# EAGLE board QwiicHUD-Panel (EAGLE 9.1.3)
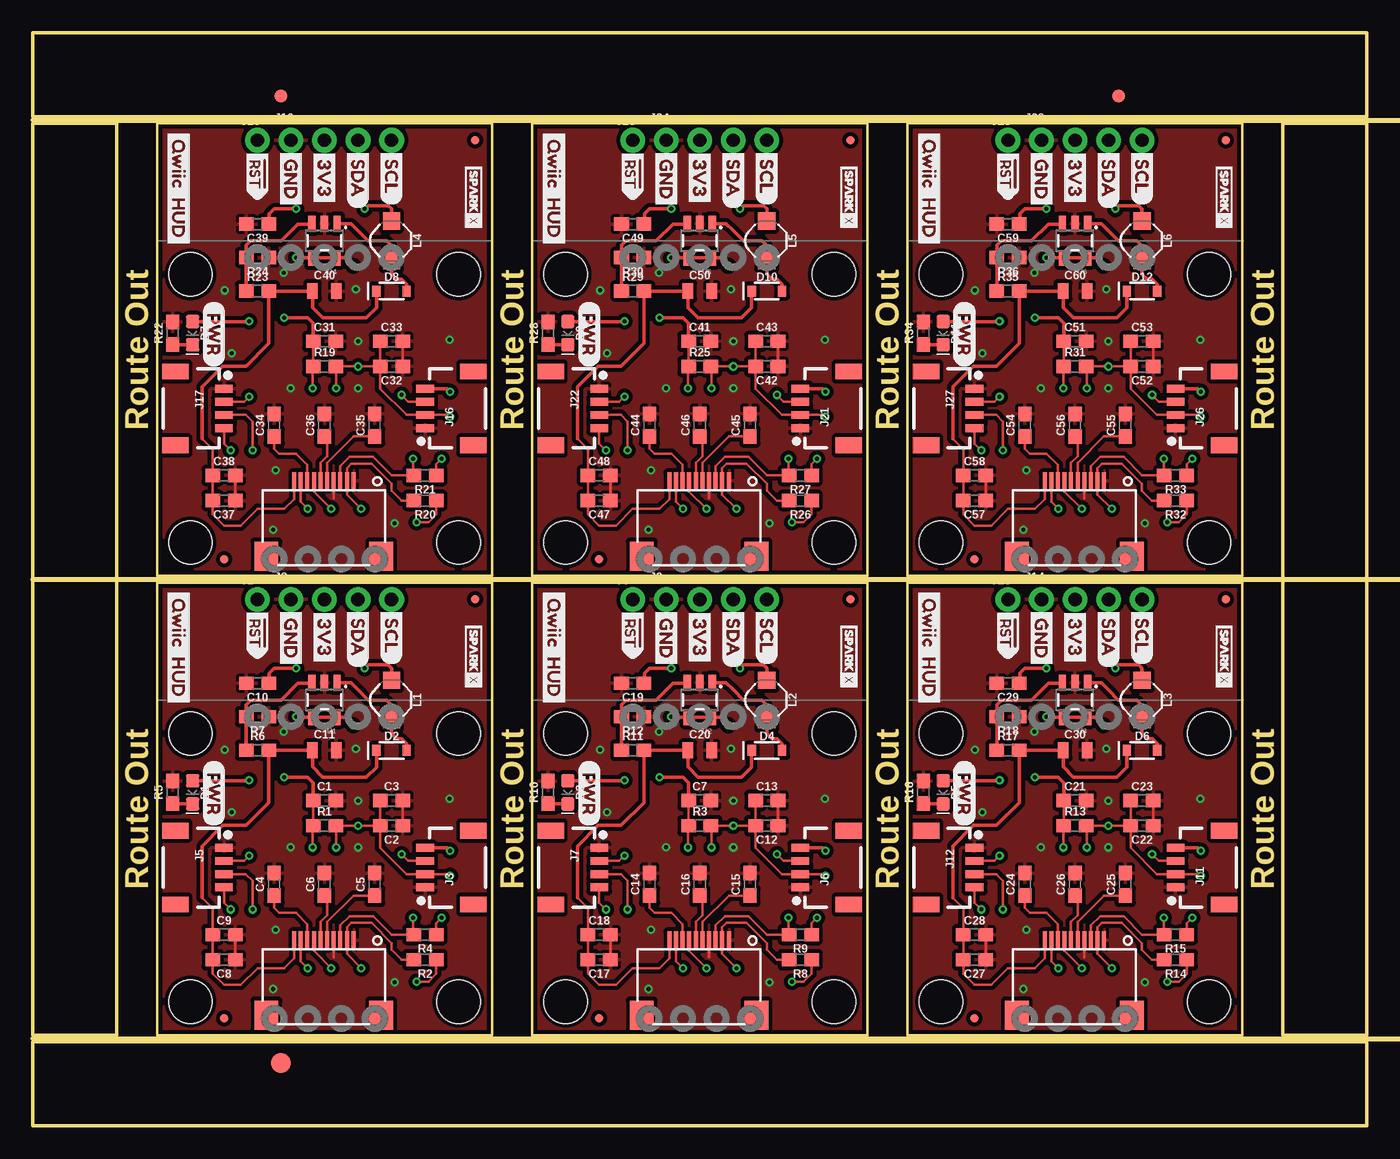
[diagram p0: board, top side]
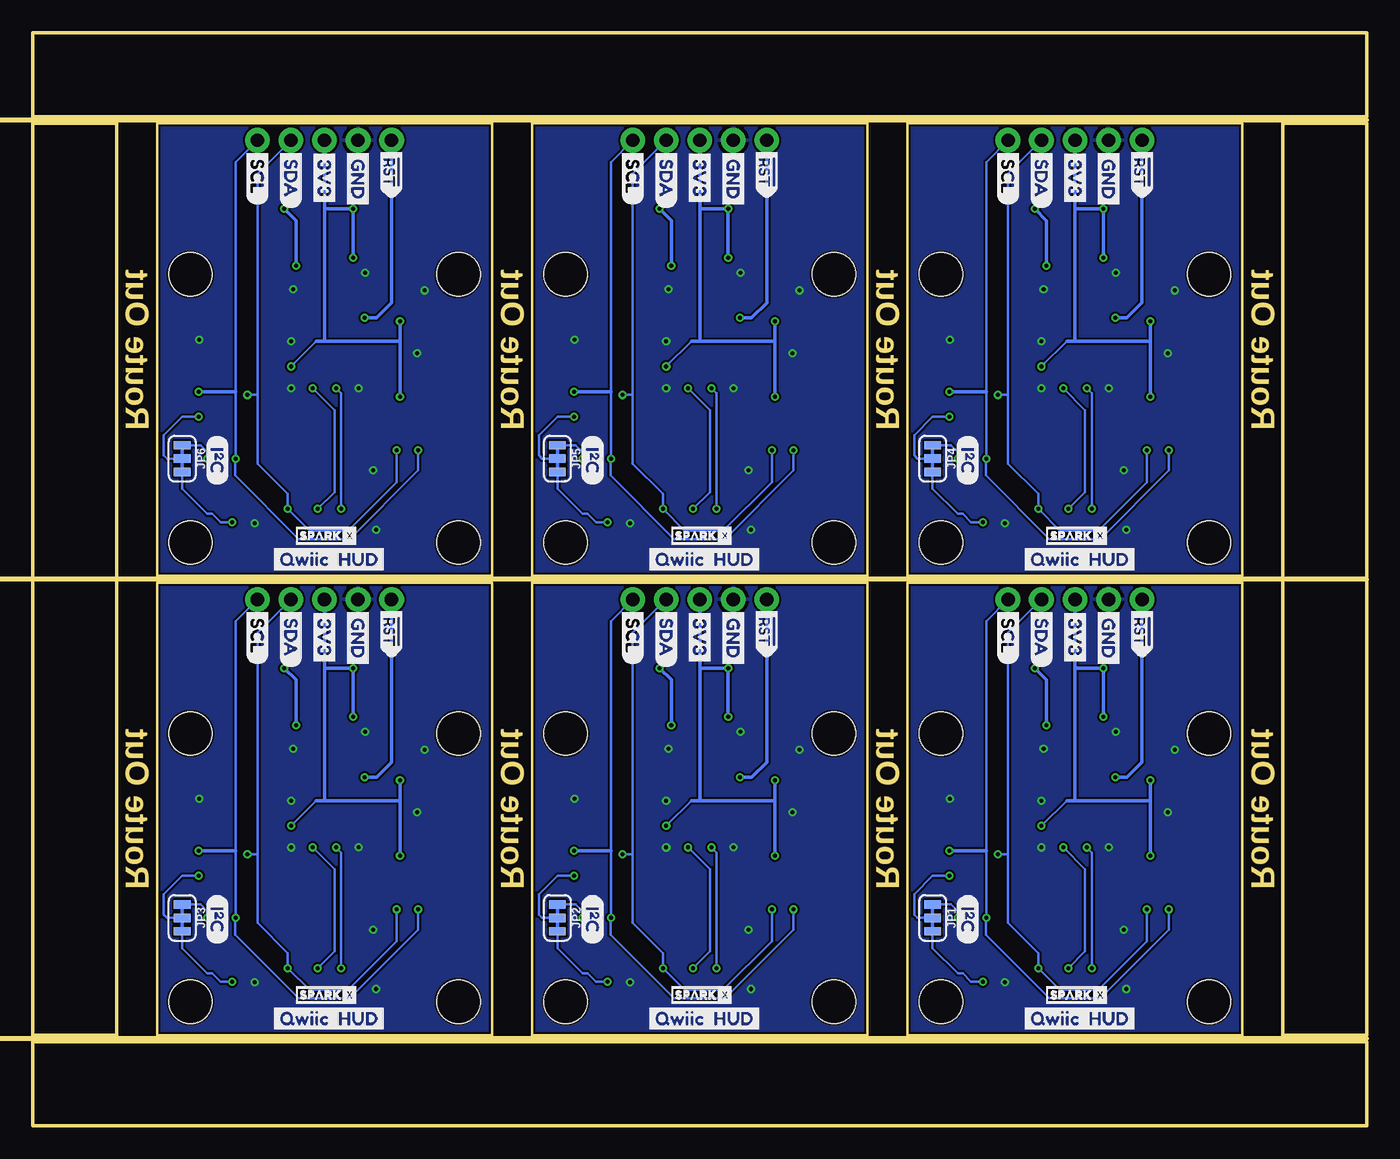
[diagram p1: board, bottom side, seen from below]

Size 101.09 x 82.8 mm. Coordinates in mm from the lower left corner, seen from the top.
Outline: 9.4,41.15 34.8,41.15 34.8,6.86 9.4,6.86 9.4,41.15
Outline: 37.85,41.15 63.25,41.15 63.25,6.86 37.85,6.86 37.85,41.15
Outline: 66.29,41.15 91.69,41.15 91.69,6.86 66.29,6.86 66.29,41.15
Outline: 9.4,75.95 34.8,75.95 34.8,41.66 9.4,41.66 9.4,75.95
Outline: 37.85,75.95 63.25,75.95 63.25,41.66 37.85,41.66 37.85,75.95
Outline: 66.29,75.95 91.69,75.95 91.69,41.66 66.29,41.66 66.29,75.95
Outline: 0,6.35 101.09,6.35 101.09,0 0,0 0,6.35
Outline: 94.74,75.95 101.09,75.95 101.09,6.86 94.74,6.86 94.74,75.95
Outline: 0,82.8 101.09,82.8 101.09,76.45 0,76.45 0,82.8
Outline: 0,75.95 6.35,75.95 6.35,6.86 0,6.86 0,75.95
Copper layers (1*16): Top 0.035mm / dielectric 1.5mm / Bottom 0.035mm
Design rules "SparkFun-2-layer-PCBWay-LIMIT": minimum track width 6mil, minimum drill 0.3mm, track to track 6mil, track to pad 6mil, pad to pad 6mil, via to via 6mil, smd to smd 6mil, copper to edge 6mil, drill to drill 6mil, minimum pad ring 6mil, minimum via ring 6mil, stop-mask expansion 4mil, vias tented up to drill 25mil, thermal gap 10mil
Milling: 3 lines

## Footprints (pad centres in the part's own frame; a part is rotated, then mirrored left to right if it is on the bottom)
0603 = smd 1.1 x 1: 1 -0.85,0; 2 0.85,0
0805 = smd 0.8 x 1.2: 1 -0.9,0; 2 0.9,0
LED-0603 = smd 1 x 1: A -0.877,0; C 0.877,0
SOD-323 = smd 0.63 x 0.83: A 1.15,0; C -1.15,0
FIDUCIAL-1X2 = smd 1 x 1: 1 0,0
FIDUCIAL-1.5X3 = smd 1.5 x 1.5: 1 0,0
FIDUCIAL-MICRO = smd 0.635 x 0.635: 1 0,0
1X01_NO_SILK = drill 1.016 pad 1.88: 1 0,0
1X04_NO_SILK = drill 1.016 pad 1.88: 1 0,0; 2 2.54,0; 3 5.08,0; 4 7.62,0
1X04_1MM_RA = smd 0.6 x 1.35: 1 -1.5,0; 2 -0.5,0; 3 0.5,0; 4 1.5,0 | smd 1.2 x 2: NC1 2.8,-3.675; NC2 -2.8,-3.675
SERIES6288 = smd 0.3 x 1.3: 1 -2.3,3.4; 2 -1.8,3.4; 3 -1.3,3.4; 4 -0.8,3.4; 5 -0.3,3.4; 6 0.2,3.4; 7 0.7,3.4; 8 1.2,3.4; 9 1.7,3.4; 10 2.2,3.4 | smd 1.8 x 2.2: NC1 -4.4,-2.3; NC2 4.3,-2.3
SMT-JUMPER_3_2-NC_TRACE_SILK = smd 0.635 x 1.27: 1 -1.016,0; 2 0,0; 3 1.016,0
INDUCTOR_4.7UH = smd 1.3 x 1.3: P$1 -1.5,0; P$2 1.5,0
SOT23-5 = smd 0.55 x 1.2: 1 -0.95,-1.3; 2 0,-1.3; 3 0.95,-1.3; 4 0.95,1.3; 5 -0.95,1.3
QWIIC_BOARD_MOUNT_HOLES = hole 3.302: -10.16,10.16; 10.16,10.16; 10.16,-10.16; -10.16,-10.16

## Placement (x,y rotation side)
C1  2.2uF  [0603]  22.1,24.64 0 top
C2  4.7uF  [0603]  27.18,22.73 180 top
C3  0.1uF  [0603]  27.18,24.64 0 top
C4  1.0uF  [0603]  18.29,18.29 90 top
C5  1.0uF  [0603]  25.91,18.29 90 top
C6  1.0uF  [0603]  22.1,18.29 90 top
C7  2.2uF  [0603]  50.55,24.64 0 top
C8  4.7uF  [0603]  14.48,12.57 180 top
C9  0.1uF  [0603]  14.48,14.48 0 top
C10  1.0uF  [0603]  17.02,33.53 180 top
C11  1.0uF/25V  [0805]  22.1,28.45 0 top
C12  4.7uF  [0603]  55.63,22.73 180 top
C13  0.1uF  [0603]  55.63,24.64 0 top
C14  1.0uF  [0603]  46.74,18.29 90 top
C15  1.0uF  [0603]  54.36,18.29 90 top
C16  1.0uF  [0603]  50.55,18.29 90 top
C17  4.7uF  [0603]  42.93,12.57 180 top
C18  0.1uF  [0603]  42.93,14.48 0 top
C19  1.0uF  [0603]  45.47,33.53 180 top
C20  1.0uF/25V  [0805]  50.55,28.45 0 top
C21  2.2uF  [0603]  78.99,24.64 0 top
C22  4.7uF  [0603]  84.07,22.73 180 top
C23  0.1uF  [0603]  84.07,24.64 0 top
C24  1.0uF  [0603]  75.18,18.29 90 top
C25  1.0uF  [0603]  82.8,18.29 90 top
C26  1.0uF  [0603]  78.99,18.29 90 top
C27  4.7uF  [0603]  71.37,12.57 180 top
C28  0.1uF  [0603]  71.37,14.48 0 top
C29  1.0uF  [0603]  73.91,33.53 180 top
C30  1.0uF/25V  [0805]  78.99,28.45 0 top
C31  2.2uF  [0603]  22.1,59.44 0 top
C32  4.7uF  [0603]  27.18,57.53 180 top
C33  0.1uF  [0603]  27.18,59.44 0 top
C34  1.0uF  [0603]  18.29,53.09 90 top
C35  1.0uF  [0603]  25.91,53.09 90 top
C36  1.0uF  [0603]  22.1,53.09 90 top
C37  4.7uF  [0603]  14.48,47.37 180 top
C38  0.1uF  [0603]  14.48,49.28 0 top
C39  1.0uF  [0603]  17.02,68.33 180 top
C40  1.0uF/25V  [0805]  22.1,63.25 0 top
C41  2.2uF  [0603]  50.55,59.44 0 top
C42  4.7uF  [0603]  55.63,57.53 180 top
C43  0.1uF  [0603]  55.63,59.44 0 top
C44  1.0uF  [0603]  46.74,53.09 90 top
C45  1.0uF  [0603]  54.36,53.09 90 top
C46  1.0uF  [0603]  50.55,53.09 90 top
C47  4.7uF  [0603]  42.93,47.37 180 top
C48  0.1uF  [0603]  42.93,49.28 0 top
C49  1.0uF  [0603]  45.47,68.33 180 top
C50  1.0uF/25V  [0805]  50.55,63.25 0 top
C51  2.2uF  [0603]  78.99,59.44 0 top
C52  4.7uF  [0603]  84.07,57.53 180 top
C53  0.1uF  [0603]  84.07,59.44 0 top
C54  1.0uF  [0603]  75.18,53.09 90 top
C55  1.0uF  [0603]  82.8,53.09 90 top
C56  1.0uF  [0603]  78.99,53.09 90 top
C57  4.7uF  [0603]  71.37,47.37 180 top
C58  0.1uF  [0603]  71.37,49.28 0 top
C59  1.0uF  [0603]  73.91,68.33 180 top
C60  1.0uF/25V  [0805]  78.99,63.25 0 top
D1  RED  [LED-0603]  12.1,25.26 270 top
D2  1A/23V/620mV  [SOD-323]  27.18,28.45 0 top
D3  RED  [LED-0603]  40.55,25.26 270 top
D4  1A/23V/620mV  [SOD-323]  55.63,28.45 0 top
D5  RED  [LED-0603]  68.99,25.26 270 top
D6  1A/23V/620mV  [SOD-323]  84.07,28.45 0 top
D7  RED  [LED-0603]  12.1,60.06 270 top
D8  1A/23V/620mV  [SOD-323]  27.18,63.25 0 top
D9  RED  [LED-0603]  40.55,60.06 270 top
D10  1A/23V/620mV  [SOD-323]  55.63,63.25 0 top
D11  RED  [LED-0603]  68.99,60.06 270 top
D12  1A/23V/620mV  [SOD-323]  84.07,63.25 0 top
E$1  [FIDUCIAL-1X2]  18.8,78.04 0 top
E$2  [FIDUCIAL-1X2]  82.3,78.04 0 top
E$3  [FIDUCIAL-1.5X3]  18.8,4.76 0 top
FD1  FIDUCIALUFIDUCIAL  [FIDUCIAL-MICRO]  14.48,8.13 0 top
FD2  FIDUCIALUFIDUCIAL  [FIDUCIAL-MICRO]  33.53,39.88 0 top
FD3  FIDUCIALUFIDUCIAL  [FIDUCIAL-MICRO]  42.93,8.13 0 top
FD4  FIDUCIALUFIDUCIAL  [FIDUCIAL-MICRO]  61.98,39.88 0 top
FD5  FIDUCIALUFIDUCIAL  [FIDUCIAL-MICRO]  71.37,8.13 0 top
FD6  FIDUCIALUFIDUCIAL  [FIDUCIAL-MICRO]  90.42,39.88 0 top
FD7  FIDUCIALUFIDUCIAL  [FIDUCIAL-MICRO]  14.48,42.93 0 top
FD8  FIDUCIALUFIDUCIAL  [FIDUCIAL-MICRO]  33.53,74.68 0 top
FD9  FIDUCIALUFIDUCIAL  [FIDUCIAL-MICRO]  42.93,42.93 0 top
FD10  FIDUCIALUFIDUCIAL  [FIDUCIAL-MICRO]  61.98,74.68 0 top
FD11  FIDUCIALUFIDUCIAL  [FIDUCIAL-MICRO]  71.37,42.93 0 top
FD12  FIDUCIALUFIDUCIAL  [FIDUCIAL-MICRO]  90.42,74.68 0 top
J1  [1X01_NO_SILK]  17.02,39.88 0 top
J2  [1X04_NO_SILK]  19.56,39.88 0 top
J3  [1X04_1MM_RA]  29.72,19.56 90 top
J4  WISECHIP_HUD_FPC  [SERIES6288]  22.1,10.67 0 top
J5  [1X04_1MM_RA]  14.48,19.56 270 top
J6  [1X04_1MM_RA]  58.17,19.56 90 top
J7  [1X04_1MM_RA]  42.93,19.56 270 top
J8  [1X01_NO_SILK]  45.47,39.88 0 top
J9  [1X04_NO_SILK]  48.01,39.88 0 top
J10  WISECHIP_HUD_FPC  [SERIES6288]  50.55,10.67 0 top
J11  [1X04_1MM_RA]  86.61,19.56 90 top
J12  [1X04_1MM_RA]  71.37,19.56 270 top
J13  [1X01_NO_SILK]  73.91,39.88 0 top
J14  [1X04_NO_SILK]  76.45,39.88 0 top
J15  WISECHIP_HUD_FPC  [SERIES6288]  78.99,10.67 0 top
J16  [1X04_1MM_RA]  29.72,54.36 90 top
J17  [1X04_1MM_RA]  14.48,54.36 270 top
J18  [1X01_NO_SILK]  17.02,74.68 0 top
J19  [1X04_NO_SILK]  19.56,74.68 0 top
J20  WISECHIP_HUD_FPC  [SERIES6288]  22.1,45.47 0 top
J21  [1X04_1MM_RA]  58.17,54.36 90 top
J22  [1X04_1MM_RA]  42.93,54.36 270 top
J23  [1X01_NO_SILK]  45.47,74.68 0 top
J24  [1X04_NO_SILK]  48.01,74.68 0 top
J25  WISECHIP_HUD_FPC  [SERIES6288]  50.55,45.47 0 top
J26  [1X04_1MM_RA]  86.61,54.36 90 top
J27  [1X04_1MM_RA]  71.37,54.36 270 top
J28  [1X01_NO_SILK]  73.91,74.68 0 top
J29  [1X04_NO_SILK]  76.45,74.68 0 top
J30  WISECHIP_HUD_FPC  [SERIES6288]  78.99,45.47 0 top
JP1  [SMT-JUMPER_3_2-NC_TRACE_SILK]  32.89,15.75 270 bottom
JP2  [SMT-JUMPER_3_2-NC_TRACE_SILK]  61.34,15.75 270 bottom
JP3  [SMT-JUMPER_3_2-NC_TRACE_SILK]  89.79,15.75 270 bottom
JP4  [SMT-JUMPER_3_2-NC_TRACE_SILK]  32.89,50.55 270 bottom
JP5  [SMT-JUMPER_3_2-NC_TRACE_SILK]  61.34,50.55 270 bottom
JP6  [SMT-JUMPER_3_2-NC_TRACE_SILK]  89.79,50.55 270 bottom
L1  10uH  [INDUCTOR_4.7UH]  27.18,32.26 270 top
L2  10uH  [INDUCTOR_4.7UH]  55.63,32.26 270 top
L3  10uH  [INDUCTOR_4.7UH]  84.07,32.26 270 top
L4  10uH  [INDUCTOR_4.7UH]  27.18,67.06 270 top
L5  10uH  [INDUCTOR_4.7UH]  55.63,67.06 270 top
L6  10uH  [INDUCTOR_4.7UH]  84.07,67.06 270 top
R1  10k  [0603]  22.1,22.73 0 top
R2  2.2k  [0603]  29.72,12.57 180 top
R3  10k  [0603]  50.55,22.73 0 top
R4  2.2k  [0603]  29.72,14.48 180 top
R5  1k  [0603]  10.6,25.26 90 top
R6  47k  [0603]  17.02,28.45 0 top
R7  5.6k  [0603]  17.02,30.99 180 top
R8  2.2k  [0603]  58.17,12.57 180 top
R9  2.2k  [0603]  58.17,14.48 180 top
R10  1k  [0603]  39.05,25.26 90 top
R11  47k  [0603]  45.47,28.45 0 top
R12  5.6k  [0603]  45.47,30.99 180 top
R13  10k  [0603]  78.99,22.73 0 top
R14  2.2k  [0603]  86.61,12.57 180 top
R15  2.2k  [0603]  86.61,14.48 180 top
R16  1k  [0603]  67.49,25.26 90 top
R17  47k  [0603]  73.91,28.45 0 top
R18  5.6k  [0603]  73.91,30.99 180 top
R19  10k  [0603]  22.1,57.53 0 top
R20  2.2k  [0603]  29.72,47.37 180 top
R21  2.2k  [0603]  29.72,49.28 180 top
R22  1k  [0603]  10.6,60.06 90 top
R23  47k  [0603]  17.02,63.25 0 top
R24  5.6k  [0603]  17.02,65.79 180 top
R25  10k  [0603]  50.55,57.53 0 top
R26  2.2k  [0603]  58.17,47.37 180 top
R27  2.2k  [0603]  58.17,49.28 180 top
R28  1k  [0603]  39.05,60.06 90 top
R29  47k  [0603]  45.47,63.25 0 top
R30  5.6k  [0603]  45.47,65.79 180 top
R31  10k  [0603]  78.99,57.53 0 top
R32  2.2k  [0603]  86.61,47.37 180 top
R33  2.2k  [0603]  86.61,49.28 180 top
R34  1k  [0603]  67.49,60.06 90 top
R35  47k  [0603]  73.91,63.25 0 top
R36  5.6k  [0603]  73.91,65.79 180 top
U1  AP3012  [SOT23-5]  22.1,32.26 180 top
U2  AP3012  [SOT23-5]  50.55,32.26 180 top
U3  AP3012  [SOT23-5]  78.99,32.26 180 top
U4  AP3012  [SOT23-5]  22.1,67.06 180 top
U5  AP3012  [SOT23-5]  50.55,67.06 180 top
U6  AP3012  [SOT23-5]  78.99,67.06 180 top
U$1  [#RST>]  17.02,39.5 270 top
U$2  QWIIC_BOARD_OUTLINEH  [QWIIC_BOARD_MOUNT_HOLES]  22.1,19.56 0 top
U$3  [SPARKX-TINY]  33.4,35.56 270 top
U$4  [SPARKX-TINY]  21.97,9.91 0 bottom
U$5  [GND]  19.56,39.37 270 top
U$6  [3V3]  22.1,39.37 270 top
U$7  [SDA]  24.64,39.37 270 top
U$8  [SCL]  27.18,39.37 270 top
U$9  [(PWR)]  13.72,27.69 270 top
U$10  [SDA]  24.64,39.37 270 bottom
U$11  [SCL]  27.18,39.37 270 bottom
U$12  [3V3]  22.1,39.37 270 bottom
U$13  [GND]  19.56,39.37 270 bottom
U$14  [#RST>]  17.02,39.62 270 bottom
U$15  QWIIC_BOARD_OUTLINEH  [QWIIC_BOARD_MOUNT_HOLES]  50.55,19.56 0 top
U$16  [QWIIC0]  11.05,40.89 270 top
U$17  [HUD1]  11.05,36.45 270 top
U$18  [QWIIC0]  26.42,8.13 0 bottom
U$19  [HUD1]  21.97,8.13 0 bottom
U$20  [(I_SUPER2_C)]  30.23,17.53 270 bottom
U$21  [SPARKX-TINY]  61.85,35.56 270 top
U$22  [SPARKX-TINY]  50.42,9.91 0 bottom
U$23  [#RST>]  45.47,39.5 270 top
U$24  [GND]  48.01,39.37 270 top
U$25  [3V3]  50.55,39.37 270 top
U$26  [SDA]  53.09,39.37 270 top
U$27  [SCL]  55.63,39.37 270 top
U$28  [(PWR)]  42.16,27.69 270 top
U$29  [SDA]  53.09,39.37 270 bottom
U$30  [SCL]  55.63,39.37 270 bottom
U$31  [3V3]  50.55,39.37 270 bottom
U$32  [GND]  48.01,39.37 270 bottom
U$33  [#RST>]  45.47,39.62 270 bottom
U$34  [QWIIC0]  39.5,40.89 270 top
U$35  [HUD1]  39.5,36.45 270 top
U$36  [QWIIC0]  54.86,8.13 0 bottom
U$37  [HUD1]  50.42,8.13 0 bottom
U$38  [(I_SUPER2_C)]  58.67,17.53 270 bottom
U$39  QWIIC_BOARD_OUTLINEH  [QWIIC_BOARD_MOUNT_HOLES]  78.99,19.56 0 top
U$40  [SPARKX-TINY]  90.3,35.56 270 top
U$41  [SPARKX-TINY]  78.87,9.91 0 bottom
U$42  [#RST>]  73.91,39.5 270 top
U$43  [GND]  76.45,39.37 270 top
U$44  [3V3]  78.99,39.37 270 top
U$45  [SDA]  81.53,39.37 270 top
U$46  [SCL]  84.07,39.37 270 top
U$47  [(PWR)]  70.61,27.69 270 top
U$48  [SDA]  81.53,39.37 270 bottom
U$49  [SCL]  84.07,39.37 270 bottom
U$50  [3V3]  78.99,39.37 270 bottom
U$51  [GND]  76.45,39.37 270 bottom
U$52  [#RST>]  73.91,39.62 270 bottom
U$53  [QWIIC0]  67.94,40.89 270 top
U$54  [HUD1]  67.94,36.45 270 top
U$55  [QWIIC0]  83.31,8.13 0 bottom
U$56  [HUD1]  78.87,8.13 0 bottom
U$57  [(I_SUPER2_C)]  87.12,17.53 270 bottom
U$58  QWIIC_BOARD_OUTLINEH  [QWIIC_BOARD_MOUNT_HOLES]  22.1,54.36 0 top
U$59  [SPARKX-TINY]  33.4,70.36 270 top
U$60  [SPARKX-TINY]  21.97,44.7 0 bottom
U$61  [#RST>]  17.02,74.3 270 top
U$62  [GND]  19.56,74.17 270 top
U$63  [3V3]  22.1,74.17 270 top
U$64  [SDA]  24.64,74.17 270 top
U$65  [SCL]  27.18,74.17 270 top
U$66  [(PWR)]  13.72,62.48 270 top
U$67  [SDA]  24.64,74.17 270 bottom
U$68  [SCL]  27.18,74.17 270 bottom
U$69  [3V3]  22.1,74.17 270 bottom
U$70  [GND]  19.56,74.17 270 bottom
U$71  [#RST>]  17.02,74.42 270 bottom
U$72  [QWIIC0]  11.05,75.69 270 top
U$73  [HUD1]  11.05,71.25 270 top
U$74  [QWIIC0]  26.42,42.93 0 bottom
U$75  [HUD1]  21.97,42.93 0 bottom
U$76  [(I_SUPER2_C)]  30.23,52.32 270 bottom
U$77  QWIIC_BOARD_OUTLINEH  [QWIIC_BOARD_MOUNT_HOLES]  50.55,54.36 0 top
U$78  [SPARKX-TINY]  61.85,70.36 270 top
U$79  [SPARKX-TINY]  50.42,44.7 0 bottom
U$80  [#RST>]  45.47,74.3 270 top
U$81  [GND]  48.01,74.17 270 top
U$82  [3V3]  50.55,74.17 270 top
U$83  [SDA]  53.09,74.17 270 top
U$84  [SCL]  55.63,74.17 270 top
U$85  [(PWR)]  42.16,62.48 270 top
U$86  [SDA]  53.09,74.17 270 bottom
U$87  [SCL]  55.63,74.17 270 bottom
U$88  [3V3]  50.55,74.17 270 bottom
U$89  [GND]  48.01,74.17 270 bottom
U$90  [#RST>]  45.47,74.42 270 bottom
U$91  [QWIIC0]  39.5,75.69 270 top
U$92  [HUD1]  39.5,71.25 270 top
U$93  [QWIIC0]  54.86,42.93 0 bottom
U$94  [HUD1]  50.42,42.93 0 bottom
U$95  [(I_SUPER2_C)]  58.67,52.32 270 bottom
U$96  QWIIC_BOARD_OUTLINEH  [QWIIC_BOARD_MOUNT_HOLES]  78.99,54.36 0 top
U$97  [SPARKX-TINY]  90.3,70.36 270 top
U$98  [SPARKX-TINY]  78.87,44.7 0 bottom
U$99  [#RST>]  73.91,74.3 270 top
U$100  [GND]  76.45,74.17 270 top
U$101  [3V3]  78.99,74.17 270 top
U$102  [SDA]  81.53,74.17 270 top
U$103  [SCL]  84.07,74.17 270 top
U$104  [(PWR)]  70.61,62.48 270 top
U$105  [SDA]  81.53,74.17 270 bottom
U$106  [SCL]  84.07,74.17 270 bottom
U$107  [3V3]  78.99,74.17 270 bottom
U$108  [GND]  76.45,74.17 270 bottom
U$109  [#RST>]  73.91,74.42 270 bottom
U$110  [QWIIC0]  67.94,75.69 270 top
U$111  [HUD1]  67.94,71.25 270 top
U$112  [QWIIC0]  83.31,42.93 0 bottom
U$113  [HUD1]  78.87,42.93 0 bottom
U$114  [(I_SUPER2_C)]  87.12,52.32 270 bottom

## Library data of the parts
C1 C7 C21 C31 C41 C51 = SparkFun-Capacitors; PROD_ID: CAP-07888
C2 C8 C12 C17 C22 C27 C32 C37 C42 C47 C52 C57 = SparkFun-Capacitors; PROD_ID: CAP-08280
C3 C9 C13 C18 C23 C28 C33 C38 C43 C48 C53 C58 = SparkFun-Capacitors; PROD_ID: CAP-08604
C4-C6 C10 C14-C16 C19 C24-C26 C29 C34-C36 C39 C44-C46 C49 C54-C56 C59 = SparkFun-Capacitors; PROD_ID: CAP-00868
C11 C20 C30 C40 C50 C60 = SparkFun-Capacitors; PROD_ID: CAP-11625
D1 D3 D5 D7 D9 D11 = SparkFun-LED; PROD_ID: DIO-00819
D2 D4 D6 D8 D10 D12 = SparkFun-DiscreteSemi; PROD_ID: DIO-11623
E$1 E$2 FD1-FD12 = SparkFun-Aesthetics
E$3 = SparkFun-Retired
J1 J8 J13 J18 J23 J28 = SparkFun-Connectors
J2 J3 J5-J7 J9 J11 J12 J14 J16 J17 J19 J21 J22 J24 J26 J27 J29 U$2-U$4 U$15 U$21 U$22 U$39-U$41 U$58-U$60 U$77-U$79 U$96-U$98 = SparkX
J4 J10 J15 J20 J25 J30 = WiseChipHUD
JP1-JP6 = SparkFun-Jumpers
L1-L6 = SparkFun-Coils; PROD_ID: NDUC-13968
R1 R3 R13 R19 R25 R31 = SparkFun-Resistors; PROD_ID: RES-00824
R2 R4 R8 R9 R14 R15 R20 R21 R26 R27 R32 R33 = SparkFun-Resistors; PROD_ID: RES-08272
R5 R10 R16 R22 R28 R34 = SparkFun-Resistors; PROD_ID: RES-07856
R6 R11 R17 R23 R29 R35 = SparkFun-Resistors; PROD_ID: RES-07871
R7 R12 R18 R24 R30 R36 = SparkFun-Resistors; PROD_ID: RES-12378
U1-U6 = 1.81_Greyscale_OLED_Breakout
U$1 U$5-U$14 U$20 U$23-U$33 U$38 U$42-U$52 U$57 U$61-U$71 U$76 U$80-U$90 U$95 U$99-U$109 U$114 = Labels-0_04
U$16-U$19 U$34-U$37 U$53-U$56 U$72-U$75 U$91-U$94 U$110-U$113 = buzzard_labels (1)

## Nets
3.3V: C2.2 C3.1 C10.1 D1.A J2.2 J3.2 J4.4 J5.2 JP1.2 L1.P$1 R1.2 U1.4 U1.5
3.3V1: C12.2 C13.1 C19.1 D3.A J6.2 J7.2 J9.2 J10.4 JP2.2 L2.P$1 R3.2 U2.4 U2.5
3.3V2: C22.2 C23.1 C29.1 D5.A J11.2 J12.2 J14.2 J15.4 JP3.2 L3.P$1 R13.2 U3.4 U3.5
3.3V3: C32.2 C33.1 C39.1 D7.A J16.2 J17.2 J19.2 J20.4 JP4.2 L4.P$1 R19.2 U4.4 U4.5
3.3V4: C42.2 C43.1 C49.1 D9.A J21.2 J22.2 J24.2 J25.4 JP5.2 L5.P$1 R25.2 U5.4 U5.5
3.3V5: C52.2 C53.1 C59.1 D11.A J26.2 J27.2 J29.2 J30.4 JP6.2 L6.P$1 R31.2 U6.4 U6.5
12V: C8.2 C9.1 C11.1 D2.C J4.1 R6.2
12V1: C17.2 C18.1 C20.1 D4.C J10.1 R11.2
12V2: C27.2 C28.1 C30.1 D6.C J15.1 R17.2
12V3: C37.2 C38.1 C40.1 D8.C J20.1 R23.2
12V4: C47.2 C48.1 C50.1 D10.C J25.1 R29.2
12V5: C57.2 C58.1 C60.1 D12.C J30.1 R35.2
!RST: C1.1 J1.1 J4.2 R1.1
!RST1: C7.1 J8.1 J10.2 R3.1
!RST2: C21.1 J13.1 J15.2 R13.1
!RST3: C31.1 J18.1 J20.2 R19.1
!RST4: C41.1 J23.1 J25.2 R25.1
!RST5: C51.1 J28.1 J30.2 R31.1
GND: C1.2 C2.1 C3.2 C4.2 C5.2 C6.2 C8.1 C9.2 C10.2 C11.2 J2.1 J3.1 J4.7 J4.10 J5.1 R5.2 R7.1 U1.2
GND1: C7.2 C12.1 C13.2 C14.2 C15.2 C16.2 C17.1 C18.2 C19.2 C20.2 J6.1 J7.1 J9.1 J10.7 J10.10 R10.2 R12.1 U2.2
GND2: C21.2 C22.1 C23.2 C24.2 C25.2 C26.2 C27.1 C28.2 C29.2 C30.2 J11.1 J12.1 J14.1 J15.7 J15.10 R16.2 R18.1 U3.2
GND3: C31.2 C32.1 C33.2 C34.2 C35.2 C36.2 C37.1 C38.2 C39.2 C40.2 J16.1 J17.1 J19.1 J20.7 J20.10 R22.2 R24.1 U4.2
GND4: C41.2 C42.1 C43.2 C44.2 C45.2 C46.2 C47.1 C48.2 C49.2 C50.2 J21.1 J22.1 J24.1 J25.7 J25.10 R28.2 R30.1 U5.2
GND5: C51.2 C52.1 C53.2 C54.2 C55.2 C56.2 C57.1 C58.2 C59.2 C60.2 J26.1 J27.1 J29.1 J30.7 J30.10 R34.2 R36.1 U6.2
IC1: C6.1 J4.5
IC2: C5.1 J4.6
IC3: C4.1 J4.3
IC4: C14.1 J10.3
IC5: C16.1 J10.5
IC6: C15.1 J10.6
IC7: C24.1 J15.3
IC8: C26.1 J15.5
IC9: C25.1 J15.6
IC10: C34.1 J20.3
IC11: C36.1 J20.5
IC12: C35.1 J20.6
IC13: C44.1 J25.3
IC14: C46.1 J25.5
IC15: C45.1 J25.6
IC16: C54.1 J30.3
IC17: C56.1 J30.5
IC18: C55.1 J30.6
N$1: JP1.3 R2.1
N$2: JP1.1 R4.1
N$3: D1.C R5.1
N$4: D2.A L1.P$2 U1.1
N$5: R6.1 R7.2 U1.3
N$6: JP2.3 R8.1
N$7: JP2.1 R9.1
N$8: D3.C R10.1
N$9: D4.A L2.P$2 U2.1
N$10: R11.1 R12.2 U2.3
N$11: JP3.3 R14.1
N$12: JP3.1 R15.1
N$13: D5.C R16.1
N$14: D6.A L3.P$2 U3.1
N$15: R17.1 R18.2 U3.3
N$16: JP4.3 R20.1
N$17: JP4.1 R21.1
N$18: D7.C R22.1
N$19: D8.A L4.P$2 U4.1
N$20: R23.1 R24.2 U4.3
N$21: JP5.3 R26.1
N$22: JP5.1 R27.1
N$23: D9.C R28.1
N$24: D10.A L5.P$2 U5.1
N$25: R29.1 R30.2 U5.3
N$26: JP6.3 R32.1
N$27: JP6.1 R33.1
N$28: D11.C R34.1
N$29: D12.A L6.P$2 U6.1
N$30: R35.1 R36.2 U6.3
SCL: J2.4 J3.4 J4.8 J5.4 R4.2
SCL1: J6.4 J7.4 J9.4 J10.8 R9.2
SCL2: J11.4 J12.4 J14.4 J15.8 R15.2
SCL3: J16.4 J17.4 J19.4 J20.8 R21.2
SCL4: J21.4 J22.4 J24.4 J25.8 R27.2
SCL5: J26.4 J27.4 J29.4 J30.8 R33.2
SDA: J2.3 J3.3 J4.9 J5.3 R2.2
SDA1: J6.3 J7.3 J9.3 J10.9 R8.2
SDA2: J11.3 J12.3 J14.3 J15.9 R14.2
SDA3: J16.3 J17.3 J19.3 J20.9 R20.2
SDA4: J21.3 J22.3 J24.3 J25.9 R26.2
SDA5: J26.3 J27.3 J29.3 J30.9 R32.2

## Tracks (layer width: path | path; a pad name or v marks a point on that pad's centre or on a via)
3.3V  (via drill 0.3)
  Top 0.203: C2.2 C3.1 | C2.2 26.33,21.04 28.31,19.06 J3.2 31.49,19.06 v31.62,18.92 | J4.4 21.3,13.25 v22.61,11.94 | v22.99,21.08 22.99,22.69 R1.2 v24.64,22.73 C2.2 | J5.2 15.99,20.06 v16.38,20.45
  Top 0.254: D1.A 16.36,26.14 v16.38,26.16 | v19.94,30.99 19.97,30.96 U1.4 U1.5 23.65,30.96 v24.26,30.35 | v19.94,34.67 18.29,34.67 17.91,34.29 17.91,33.57 C10.1 | L1.P$1 27.18,34.67 26.92,34.92 25.4,34.92 v25.15,34.67
  Bottom 0.203: v22.61,11.94 21.34,13.21 21.34,19.43 v22.99,21.08 | 22.73,24.64 v24.64,22.73 | v31.62,18.92 32.89,18.92 34.29,17.53 34.29,16 34.04,15.75 JP1.2
  Bottom 0.254: 22.73,24.64 22.1,24.64 | 22.1,24.64 16.38,24.64 | 16.38,24.64 v16.38,20.45 | 16.38,24.64 v16.38,26.16 | J2.2 22.1,34.8 | 22.1,34.8 22.1,24.64 | v19.94,30.99 v19.94,34.67 21.97,34.67 22.1,34.8 | v24.26,30.35 24.26,33.78 v25.15,34.67
3.3V1  (via drill 0.3)
  Top 0.203: C12.2 C13.1 | C12.2 54.78,21.04 56.76,19.06 J6.2 59.94,19.06 v60.07,18.92 | J10.4 49.75,13.25 v51.05,11.94 | v51.44,21.08 51.44,22.69 R3.2 v53.09,22.73 C12.2 | J7.2 44.44,20.06 v44.83,20.45
  Top 0.254: D3.A 44.8,26.14 v44.83,26.16 | v48.39,30.99 48.42,30.96 U2.4 U2.5 52.1,30.96 v52.7,30.35 | v48.39,34.67 46.74,34.67 46.36,34.29 46.36,33.57 C19.1 | L2.P$1 55.63,34.67 55.37,34.92 53.85,34.92 v53.59,34.67
  Bottom 0.203: v51.05,11.94 49.78,13.21 49.78,19.43 v51.44,21.08 | 51.18,24.64 v53.09,22.73 | v60.07,18.92 61.34,18.92 62.74,17.53 62.74,16 62.48,15.75 JP2.2
  Bottom 0.254: 51.18,24.64 50.55,24.64 | 50.55,24.64 44.83,24.64 | 44.83,24.64 v44.83,20.45 | 44.83,24.64 v44.83,26.16 | J9.2 50.55,34.8 | 50.55,34.8 50.55,24.64 | v48.39,30.99 v48.39,34.67 50.42,34.67 50.55,34.8 | v52.7,30.35 52.7,33.78 v53.59,34.67
3.3V2  (via drill 0.3)
  Top 0.203: C22.2 C23.1 | C22.2 83.22,21.04 85.21,19.06 J11.2 88.38,19.06 v88.52,18.92 | J15.4 78.19,13.25 v79.5,11.94 | v79.88,21.08 79.88,22.69 R13.2 v81.53,22.73 C22.2 | J12.2 72.89,20.06 v73.28,20.45
  Top 0.254: D5.A 73.25,26.14 v73.28,26.16 | v76.83,30.99 76.86,30.96 U3.4 U3.5 80.55,30.96 v81.15,30.35 | v76.83,34.67 75.18,34.67 74.8,34.29 74.8,33.57 C29.1 | L3.P$1 84.07,34.67 83.82,34.92 82.3,34.92 v82.04,34.67
  Bottom 0.203: v79.5,11.94 78.23,13.21 78.23,19.43 v79.88,21.08 | 79.63,24.64 v81.53,22.73 | v88.52,18.92 89.79,18.92 91.19,17.53 91.19,16 90.93,15.75 JP3.2
  Bottom 0.254: 79.63,24.64 78.99,24.64 | 78.99,24.64 73.28,24.64 | 73.28,24.64 v73.28,20.45 | 73.28,24.64 v73.28,26.16 | J14.2 78.99,34.8 | 78.99,34.8 78.99,24.64 | v76.83,30.99 v76.83,34.67 78.87,34.67 78.99,34.8 | v81.15,30.35 81.15,33.78 v82.04,34.67
3.3V3  (via drill 0.3)
  Top 0.203: C32.2 C33.1 | C32.2 26.33,55.84 28.31,53.86 J16.2 31.49,53.86 v31.62,53.72 | J20.4 21.3,48.04 v22.61,46.74 | v22.99,55.88 22.99,57.49 R19.2 v24.64,57.53 C32.2 | J17.2 15.99,54.86 v16.38,55.24
  Top 0.254: D7.A 16.36,60.93 v16.38,60.96 | v19.94,65.79 19.97,65.76 U4.4 U4.5 23.65,65.76 v24.26,65.15 | v19.94,69.47 18.29,69.47 17.91,69.09 17.91,68.36 C39.1 | L4.P$1 27.18,69.47 26.92,69.72 25.4,69.72 v25.15,69.47
  Bottom 0.203: v22.61,46.74 21.34,48.01 21.34,54.23 v22.99,55.88 | 22.73,59.44 v24.64,57.53 | v31.62,53.72 32.89,53.72 34.29,52.32 34.29,50.8 34.04,50.55 JP4.2
  Bottom 0.254: 22.73,59.44 22.1,59.44 | 22.1,59.44 16.38,59.44 | 16.38,59.44 v16.38,55.24 | 16.38,59.44 v16.38,60.96 | J19.2 22.1,69.6 | 22.1,69.6 22.1,59.44 | v19.94,65.79 v19.94,69.47 21.97,69.47 22.1,69.6 | v24.26,65.15 24.26,68.58 v25.15,69.47
3.3V4  (via drill 0.3)
  Top 0.203: C42.2 C43.1 | C42.2 54.78,55.84 56.76,53.86 J21.2 59.94,53.86 v60.07,53.72 | J25.4 49.75,48.04 v51.05,46.74 | v51.44,55.88 51.44,57.49 R25.2 v53.09,57.53 C42.2 | J22.2 44.44,54.86 v44.83,55.24
  Top 0.254: D9.A 44.8,60.93 v44.83,60.96 | v48.39,65.79 48.42,65.76 U5.4 U5.5 52.1,65.76 v52.7,65.15 | v48.39,69.47 46.74,69.47 46.36,69.09 46.36,68.36 C49.1 | L5.P$1 55.63,69.47 55.37,69.72 53.85,69.72 v53.59,69.47
  Bottom 0.203: v51.05,46.74 49.78,48.01 49.78,54.23 v51.44,55.88 | 51.18,59.44 v53.09,57.53 | v60.07,53.72 61.34,53.72 62.74,52.32 62.74,50.8 62.48,50.55 JP5.2
  Bottom 0.254: 51.18,59.44 50.55,59.44 | 50.55,59.44 44.83,59.44 | 44.83,59.44 v44.83,55.24 | 44.83,59.44 v44.83,60.96 | J24.2 50.55,69.6 | 50.55,69.6 50.55,59.44 | v48.39,65.79 v48.39,69.47 50.42,69.47 50.55,69.6 | v52.7,65.15 52.7,68.58 v53.59,69.47
3.3V5  (via drill 0.3)
  Top 0.203: C52.2 C53.1 | C52.2 83.22,55.84 85.21,53.86 J26.2 88.38,53.86 v88.52,53.72 | J30.4 78.19,48.04 v79.5,46.74 | v79.88,55.88 79.88,57.49 R31.2 v81.53,57.53 C52.2 | J27.2 72.89,54.86 v73.28,55.24
  Top 0.254: D11.A 73.25,60.93 v73.28,60.96 | v76.83,65.79 76.86,65.76 U6.4 U6.5 80.55,65.76 v81.15,65.15 | v76.83,69.47 75.18,69.47 74.8,69.09 74.8,68.36 C59.1 | L6.P$1 84.07,69.47 83.82,69.72 82.3,69.72 v82.04,69.47
  Bottom 0.203: v79.5,46.74 78.23,48.01 78.23,54.23 v79.88,55.88 | 79.63,59.44 v81.53,57.53 | v88.52,53.72 89.79,53.72 91.19,52.32 91.19,50.8 90.93,50.55 JP6.2
  Bottom 0.254: 79.63,59.44 78.99,59.44 | 78.99,59.44 73.28,59.44 | 73.28,59.44 v73.28,55.24 | 73.28,59.44 v73.28,60.96 | J29.2 78.99,69.6 | 78.99,69.6 78.99,59.44 | v76.83,65.79 v76.83,69.47 78.87,69.47 78.99,69.6 | v81.15,65.15 81.15,68.58 v82.04,69.47
12V
  Top 0.203: C8.2 C9.1 | C9.1 13.63,11.52 14.48,10.67 15.75,10.67 17.02,11.94 19.05,11.94 19.8,12.69 J4.1 | C9.1 13.63,16.47 12.83,17.27
  Top 0.254: D2.C 26.04,27.18 25.27,26.42 21.97,26.42 21.2,27.19 C11.1 R6.2 17.87,24.48 16.14,22.76 14.4,22.76 12.83,21.19 12.83,17.27
12V1
  Top 0.203: C17.2 C18.1 | C18.1 42.08,11.52 42.93,10.67 44.2,10.67 45.47,11.94 47.5,11.94 48.25,12.69 J10.1 | C18.1 42.08,16.47 41.27,17.27
  Top 0.254: D4.C 54.48,27.18 53.72,26.42 50.42,26.42 49.65,27.19 C20.1 R11.2 46.32,24.48 44.59,22.76 42.85,22.76 41.27,21.19 41.27,17.27
12V2
  Top 0.203: C27.2 C28.1 | C28.1 70.52,11.52 71.37,10.67 72.64,10.67 73.91,11.94 75.95,11.94 76.69,12.69 J15.1 | C28.1 70.52,16.47 69.72,17.27
  Top 0.254: D6.C 82.93,27.18 82.17,26.42 78.87,26.42 78.09,27.19 C30.1 R17.2 74.76,24.48 73.04,22.76 71.29,22.76 69.72,21.19 69.72,17.27
12V3
  Top 0.203: C37.2 C38.1 | C38.1 13.63,46.32 14.48,45.47 15.75,45.47 17.02,46.74 19.05,46.74 19.8,47.48 J20.1 | C38.1 13.63,51.27 12.83,52.07
  Top 0.254: D8.C 26.04,61.98 25.27,61.21 21.97,61.21 21.2,61.99 C40.1 R23.2 17.87,59.28 16.14,57.56 14.4,57.56 12.83,55.98 12.83,52.07
12V4
  Top 0.203: C47.2 C48.1 | C48.1 42.08,46.32 42.93,45.47 44.2,45.47 45.47,46.74 47.5,46.74 48.25,47.48 J25.1 | C48.1 42.08,51.27 41.27,52.07
  Top 0.254: D10.C 54.48,61.98 53.72,61.21 50.42,61.21 49.65,61.99 C50.1 R29.2 46.32,59.28 44.59,57.56 42.85,57.56 41.27,55.98 41.27,52.07
12V5
  Top 0.203: C57.2 C58.1 | C58.1 70.52,46.32 71.37,45.47 72.64,45.47 73.91,46.74 75.95,46.74 76.69,47.48 J30.1 | C58.1 70.52,51.27 69.72,52.07
  Top 0.254: D12.C 82.93,61.98 82.17,61.21 78.87,61.21 78.09,61.99 C60.1 R35.2 74.76,59.28 73.04,57.56 71.29,57.56 69.72,55.98 69.72,52.07
!RST  (via drill 0.3)
  Top 0.203: C1.1 R1.1 21.21,22.69 v21.21,21.08 | J4.2 20.3,12.47 v20.83,11.94
  Top 0.254: C1.1 21.25,26 20.83,26.42 v19.05,26.42
  Bottom 0.203: v20.83,11.94 20.83,20.7 v21.21,21.08
  Bottom 0.254: v19.05,26.42 18.16,26.42 17.02,27.56 J1.1
!RST1  (via drill 0.3)
  Top 0.203: C7.1 R3.1 49.66,22.69 v49.66,21.08 | J10.2 48.75,12.47 v49.28,11.94
  Top 0.254: C7.1 49.7,26 49.28,26.42 v47.5,26.42
  Bottom 0.203: v49.28,11.94 49.28,20.7 v49.66,21.08
  Bottom 0.254: v47.5,26.42 46.61,26.42 45.47,27.56 J8.1
!RST2  (via drill 0.3)
  Top 0.203: C21.1 R13.1 78.1,22.69 v78.1,21.08 | J15.2 77.19,12.47 v77.72,11.94
  Top 0.254: C21.1 78.14,26 77.72,26.42 v75.95,26.42
  Bottom 0.203: v77.72,11.94 77.72,20.7 v78.1,21.08
  Bottom 0.254: v75.95,26.42 75.06,26.42 73.91,27.56 J13.1
!RST3  (via drill 0.3)
  Top 0.203: C31.1 R19.1 21.21,57.49 v21.21,55.88 | J20.2 20.3,47.27 v20.83,46.74
  Top 0.254: C31.1 21.25,60.79 20.83,61.21 v19.05,61.21
  Bottom 0.203: v20.83,46.74 20.83,55.5 v21.21,55.88
  Bottom 0.254: v19.05,61.21 18.16,61.21 17.02,62.36 J18.1
!RST4  (via drill 0.3)
  Top 0.203: C41.1 R25.1 49.66,57.49 v49.66,55.88 | J25.2 48.75,47.27 v49.28,46.74
  Top 0.254: C41.1 49.7,60.79 49.28,61.21 v47.5,61.21
  Bottom 0.203: v49.28,46.74 49.28,55.5 v49.66,55.88
  Bottom 0.254: v47.5,61.21 46.61,61.21 45.47,62.36 J23.1
!RST5  (via drill 0.3)
  Top 0.203: C51.1 R31.1 78.1,57.49 v78.1,55.88 | J30.2 77.19,47.27 v77.72,46.74
  Top 0.254: C51.1 78.14,60.79 77.72,61.21 v75.95,61.21
  Bottom 0.203: v77.72,46.74 77.72,55.5 v78.1,55.88
  Bottom 0.254: v75.95,61.21 75.06,61.21 73.91,62.36 J28.1
GND  (via drill 0.3)
  Top 0.203: C8.1 C9.2 | C3.2 C2.1 | J4.7 22.8,12.76
  other vias: 24.64,24.64 24.64,21.08 14.52,28.49 15.08,23.75 18.4,14.86 18.2,10.36 27.4,10.86 24.48,28.58 31.59,24.77 19.02,29.85 19.52,21.08
  pour Bottom: 9.4,41.15 34.8,41.15 34.8,6.86 9.4,6.86
  pour Top (isolate 0.305): 9.4,41.15 34.8,41.15 34.8,6.86 9.4,6.86
GND1  (via drill 0.3)
  Top 0.203: C17.1 C18.2 | C13.2 C12.1 | J10.7 51.25,12.76
  other vias: 53.09,24.64 53.09,21.08 42.97,28.49 43.53,23.75 46.85,14.86 46.65,10.36 55.85,10.86 52.92,28.58 60.04,24.77 47.46,29.85 47.97,21.08
  pour Bottom: 37.85,41.15 63.25,41.15 63.25,6.86 37.85,6.86
  pour Top (isolate 0.305): 37.85,41.15 63.25,41.15 63.25,6.86 37.85,6.86
GND2  (via drill 0.3)
  Top 0.203: C27.1 C28.2 | C23.2 C22.1 | J15.7 79.69,12.76
  other vias: 81.53,24.64 81.53,21.08 71.42,28.49 71.97,23.75 75.29,14.86 75.09,10.36 84.29,10.86 81.37,28.58 88.48,24.77 75.91,29.85 76.42,21.08
  pour Bottom: 66.29,41.15 91.69,41.15 91.69,6.86 66.29,6.86
  pour Top (isolate 0.305): 66.29,41.15 91.69,41.15 91.69,6.86 66.29,6.86
GND3  (via drill 0.3)
  Top 0.203: C37.1 C38.2 | C33.2 C32.1 | J20.7 22.8,47.56
  other vias: 24.64,59.44 24.64,55.88 14.52,63.29 15.08,58.55 18.4,49.66 18.2,45.16 27.4,45.66 24.48,63.37 31.59,59.56 19.02,64.64 19.52,55.88
  pour Bottom: 9.4,75.95 34.8,75.95 34.8,41.66 9.4,41.66
  pour Top (isolate 0.305): 9.4,75.95 34.8,75.95 34.8,41.66 9.4,41.66
GND4  (via drill 0.3)
  Top 0.203: C47.1 C48.2 | C43.2 C42.1 | J25.7 51.25,47.56
  other vias: 53.09,59.44 53.09,55.88 42.97,63.29 43.53,58.55 46.85,49.66 46.65,45.16 55.85,45.66 52.92,63.37 60.04,59.56 47.46,64.64 47.97,55.88
  pour Bottom: 37.85,75.95 63.25,75.95 63.25,41.66 37.85,41.66
  pour Top (isolate 0.305): 37.85,75.95 63.25,75.95 63.25,41.66 37.85,41.66
GND5  (via drill 0.3)
  Top 0.203: C57.1 C58.2 | C53.2 C52.1 | J30.7 79.69,47.56
  other vias: 81.53,59.44 81.53,55.88 71.42,63.29 71.97,58.55 75.29,49.66 75.09,45.16 84.29,45.66 81.37,63.37 88.48,59.56 75.91,64.64 76.42,55.88
  pour Bottom: 66.29,75.95 91.69,75.95 91.69,41.66 66.29,41.66
  pour Top (isolate 0.305): 66.29,75.95 91.69,75.95 91.69,41.66 66.29,41.66
IC1
  Top 0.203: C6.1 22.3,17.24 22.3,15.95 21.8,15.45 J4.5
IC2
  Top 0.203: C5.1 24.3,17.44 22.3,15.44 J4.6
IC3
  Top 0.203: C4.1 18.29,16.51 18.67,16.13 19.94,16.13 20.8,15.27 J4.3
IC4
  Top 0.203: C14.1 46.74,16.51 47.12,16.13 48.39,16.13 49.25,15.27 J10.3
IC5
  Top 0.203: C16.1 50.75,17.24 50.75,15.95 50.25,15.45 J10.5
IC6
  Top 0.203: C15.1 52.74,17.44 50.75,15.44 J10.6
IC7
  Top 0.203: C24.1 75.18,16.51 75.56,16.13 76.83,16.13 77.69,15.27 J15.3
IC8
  Top 0.203: C26.1 79.19,17.24 79.19,15.95 78.69,15.45 J15.5
IC9
  Top 0.203: C25.1 81.19,17.44 79.19,15.44 J15.6
IC10
  Top 0.203: C34.1 18.29,51.31 18.67,50.93 19.94,50.93 20.8,50.07 J20.3
IC11
  Top 0.203: C36.1 22.3,52.04 22.3,50.75 21.8,50.25 J20.5
IC12
  Top 0.203: C35.1 24.3,52.24 22.3,50.24 J20.6
IC13
  Top 0.203: C44.1 46.74,51.31 47.12,50.93 48.39,50.93 49.25,50.07 J25.3
IC14
  Top 0.203: C46.1 50.75,52.04 50.75,50.75 50.25,50.25 J25.5
IC15
  Top 0.203: C45.1 52.74,52.24 50.75,50.24 J25.6
IC16
  Top 0.203: C54.1 75.18,51.31 75.56,50.93 76.83,50.93 77.69,50.07 J30.3
IC17
  Top 0.203: C56.1 79.19,52.04 79.19,50.75 78.69,50.25 J30.5
IC18
  Top 0.203: C55.1 81.19,52.24 79.19,50.24 J30.6
N$1  (via drill 0.3)
  Top 0.203: R2.1 30.57,11.52 29.97,10.92 v29.08,10.92
  Bottom 0.203: v29.08,10.92 29.97,10.92 30.61,11.56 30.99,11.56 32.89,13.46 JP1.3
N$2  (via drill 0.3)
  Top 0.203: R4.1 30.57,15.33 v30.99,15.75
  Bottom 0.203: v30.99,15.75 30.99,16.26 31.5,16.76 JP1.1
N$3
  Top 0.254: D1.C 10.62,24.38 R5.1
N$4
  Top 0.254: D2.A 28.33,28.96 27.95,29.33 27.57,29.33 27.18,29.72 27.18,30.86 | L1.P$2 27.18,30.86 | 27.18,30.86 27.18,31.88 26.8,32.26 25.4,32.26 24.64,33.02 24.1,33.56 U1.1
N$5
  Top 0.254: R6.1 R7.2 16.17,31.92 16.51,32.26 18.8,32.26 20.07,33.53 21.12,33.53 U1.3
N$6  (via drill 0.3)
  Top 0.203: R8.1 59.02,11.52 58.42,10.92 v57.53,10.92
  Bottom 0.203: v57.53,10.92 58.42,10.92 59.05,11.56 59.44,11.56 61.34,13.46 JP2.3
N$7  (via drill 0.3)
  Top 0.203: R9.1 59.02,15.33 v59.44,15.75
  Bottom 0.203: v59.44,15.75 59.44,16.26 59.94,16.76 JP2.1
N$8
  Top 0.254: D3.C 39.07,24.38 R10.1
N$9
  Top 0.254: D4.A 56.78,28.96 56.4,29.33 56.01,29.33 55.63,29.72 55.63,30.86 | L2.P$2 55.63,30.86 | 55.63,30.86 55.63,31.88 55.25,32.26 53.85,32.26 53.09,33.02 52.55,33.56 U2.1
N$10
  Top 0.254: R11.1 R12.2 44.62,31.92 44.96,32.26 47.24,32.26 48.51,33.53 49.57,33.53 U2.3
N$11  (via drill 0.3)
  Top 0.203: R14.1 87.46,11.52 86.87,10.92 v85.98,10.92
  Bottom 0.203: v85.98,10.92 86.87,10.92 87.5,11.56 87.88,11.56 89.79,13.46 JP3.3
N$12  (via drill 0.3)
  Top 0.203: R15.1 87.46,15.33 v87.88,15.75
  Bottom 0.203: v87.88,15.75 87.88,16.26 88.39,16.76 JP3.1
N$13
  Top 0.254: D5.C 67.52,24.38 R16.1
N$14
  Top 0.254: D6.A 85.22,28.96 84.85,29.33 84.46,29.33 84.07,29.72 84.07,30.86 | L3.P$2 84.07,30.86 | 84.07,30.86 84.07,31.88 83.69,32.26 82.3,32.26 81.53,33.02 81,33.56 U3.1
N$15
  Top 0.254: R17.1 R18.2 73.06,31.92 73.41,32.26 75.69,32.26 76.96,33.53 78.01,33.53 U3.3
N$16  (via drill 0.3)
  Top 0.203: R20.1 30.57,46.32 29.97,45.72 v29.08,45.72
  Bottom 0.203: v29.08,45.72 29.97,45.72 30.61,46.35 30.99,46.35 32.89,48.26 JP4.3
N$17  (via drill 0.3)
  Top 0.203: R21.1 30.57,50.13 v30.99,50.55
  Bottom 0.203: v30.99,50.55 30.99,51.05 31.5,51.56 JP4.1
N$18
  Top 0.254: D7.C 10.62,59.18 R22.1
N$19
  Top 0.254: D8.A 28.33,63.75 27.95,64.13 27.57,64.13 27.18,64.52 27.18,65.66 | L4.P$2 27.18,65.66 | 27.18,65.66 27.18,66.67 26.8,67.06 25.4,67.06 24.64,67.82 24.1,68.36 U4.1
N$20
  Top 0.254: R23.1 R24.2 16.17,66.71 16.51,67.06 18.8,67.06 20.07,68.33 21.12,68.33 U4.3
N$21  (via drill 0.3)
  Top 0.203: R26.1 59.02,46.32 58.42,45.72 v57.53,45.72
  Bottom 0.203: v57.53,45.72 58.42,45.72 59.05,46.35 59.44,46.35 61.34,48.26 JP5.3
N$22  (via drill 0.3)
  Top 0.203: R27.1 59.02,50.13 v59.44,50.55
  Bottom 0.203: v59.44,50.55 59.44,51.05 59.94,51.56 JP5.1
N$23
  Top 0.254: D9.C 39.07,59.18 R28.1
N$24
  Top 0.254: D10.A 56.78,63.75 56.4,64.13 56.01,64.13 55.63,64.52 55.63,65.66 | L5.P$2 55.63,65.66 | 55.63,65.66 55.63,66.67 55.25,67.06 53.85,67.06 53.09,67.82 52.55,68.36 U5.1
N$25
  Top 0.254: R29.1 R30.2 44.62,66.71 44.96,67.06 47.24,67.06 48.51,68.33 49.57,68.33 U5.3
N$26  (via drill 0.3)
  Top 0.203: R32.1 87.46,46.32 86.87,45.72 v85.98,45.72
  Bottom 0.203: v85.98,45.72 86.87,45.72 87.5,46.35 87.88,46.35 89.79,48.26 JP6.3
N$27  (via drill 0.3)
  Top 0.203: R33.1 87.46,50.13 v87.88,50.55
  Bottom 0.203: v87.88,50.55 87.88,51.05 88.39,51.56 JP6.1
N$28
  Top 0.254: D11.C 67.52,59.18 R34.1
N$29
  Top 0.254: D12.A 85.22,63.75 84.85,64.13 84.46,64.13 84.07,64.52 84.07,65.66 | L6.P$2 84.07,65.66 | 84.07,65.66 84.07,66.67 83.69,67.06 82.3,67.06 81.53,67.82 81,68.36 U6.1
N$30
  Top 0.254: R35.1 R36.2 73.06,66.71 73.41,67.06 75.69,67.06 76.96,68.33 78.01,68.33 U6.3
SCL  (via drill 0.3)
  Top 0.203: R4.2 28.83,14.48 | J4.8 23.3,15.17 24,15.88 25.78,15.88 27.18,14.48 28.83,14.48 | 28.83,14.48 v28.83,15.75 | J5.4 14.48,16.89 v14.99,16.38
  Top 0.254: J3.4 31.39,21.06 v31.62,20.83
  Bottom 0.203: J2.4 28.83,38.23 28.83,20.83 v28.83,15.75 28.87,15.71 R4.2 24.04,9.65 20.19,9.65 14.99,14.86 v14.99,16.38
  Bottom 0.254: v31.62,20.83 28.83,20.83
SCL1  (via drill 0.3)
  Top 0.203: R9.2 57.28,14.48 | J10.8 51.75,15.17 52.45,15.88 54.23,15.88 55.63,14.48 57.28,14.48 | 57.28,14.48 v57.28,15.75 | J7.4 42.93,16.89 v43.43,16.38
  Top 0.254: J6.4 59.84,21.06 v60.07,20.83
  Bottom 0.203: J9.4 57.28,38.23 57.28,20.83 v57.28,15.75 57.32,15.71 R9.2 52.49,9.65 48.64,9.65 43.43,14.86 v43.43,16.38
  Bottom 0.254: v60.07,20.83 57.28,20.83
SCL2  (via drill 0.3)
  Top 0.203: R15.2 85.72,14.48 | J15.8 80.19,15.17 80.9,15.88 82.68,15.88 84.07,14.48 85.72,14.48 | 85.72,14.48 v85.72,15.75 | J12.4 71.37,16.89 v71.88,16.38
  Top 0.254: J11.4 88.29,21.06 v88.52,20.83
  Bottom 0.203: J14.4 85.72,38.23 85.72,20.83 v85.72,15.75 85.76,15.71 R15.2 80.94,9.65 77.09,9.65 71.88,14.86 v71.88,16.38
  Bottom 0.254: v88.52,20.83 85.72,20.83
SCL3  (via drill 0.3)
  Top 0.203: R21.2 28.83,49.28 | J20.8 23.3,49.97 24,50.67 25.78,50.67 27.18,49.28 28.83,49.28 | 28.83,49.28 v28.83,50.55 | J17.4 14.48,51.69 v14.99,51.18
  Top 0.254: J16.4 31.39,55.86 v31.62,55.63
  Bottom 0.203: J19.4 28.83,73.03 28.83,55.63 v28.83,50.55 28.87,50.51 R21.2 24.04,44.45 20.19,44.45 14.99,49.66 v14.99,51.18
  Bottom 0.254: v31.62,55.63 28.83,55.63
SCL4  (via drill 0.3)
  Top 0.203: R27.2 57.28,49.28 | J25.8 51.75,49.97 52.45,50.67 54.23,50.67 55.63,49.28 57.28,49.28 | 57.28,49.28 v57.28,50.55 | J22.4 42.93,51.69 v43.43,51.18
  Top 0.254: J21.4 59.84,55.86 v60.07,55.63
  Bottom 0.203: J24.4 57.28,73.03 57.28,55.63 v57.28,50.55 57.32,50.51 R27.2 52.49,44.45 48.64,44.45 43.43,49.66 v43.43,51.18
  Bottom 0.254: v60.07,55.63 57.28,55.63
SCL5  (via drill 0.3)
  Top 0.203: R33.2 85.72,49.28 | J30.8 80.19,49.97 80.9,50.67 82.68,50.67 84.07,49.28 85.72,49.28 | 85.72,49.28 v85.72,50.55 | J27.4 71.37,51.69 v71.88,51.18
  Top 0.254: J26.4 88.29,55.86 v88.52,55.63
  Bottom 0.203: J29.4 85.72,73.03 85.72,55.63 v85.72,50.55 85.76,50.51 R33.2 80.94,44.45 77.09,44.45 71.88,49.66 v71.88,51.18
  Bottom 0.254: v88.52,55.63 85.72,55.63
SDA  (via drill 0.3)
  Top 0.203: R2.2 27.94,12.57 27.18,13.34 27.18,13.84 25.65,15.37 24.13,15.37 23.8,15.04 J4.9 23.8,13.03 v24.89,11.94 | J3.3 28.46,20.06 v27.94,20.57 | J5.3 16.12,19.06 16.64,18.54 v16.64,16.38
  Bottom 0.203: 27.18,20.57 27.18,15.37 24.89,13.08 v24.89,11.94 23.24,10.29 20.32,10.29 16.64,13.97 v16.64,16.38 | 27.18,20.57 27.18,37.34 J2.3 | v27.94,20.57 27.18,20.57
SDA1  (via drill 0.3)
  Top 0.203: R8.2 56.39,12.57 55.63,13.34 55.63,13.84 54.1,15.37 52.58,15.37 52.25,15.04 J10.9 52.25,13.03 v53.34,11.94 | J6.3 56.9,20.06 v56.39,20.57 | J7.3 44.57,19.06 45.08,18.54 v45.08,16.38
  Bottom 0.203: 55.63,20.57 55.63,15.37 53.34,13.08 v53.34,11.94 51.69,10.29 48.77,10.29 45.08,13.97 v45.08,16.38 | 55.63,20.57 55.63,37.34 J9.3 | v56.39,20.57 55.63,20.57
SDA2  (via drill 0.3)
  Top 0.203: R14.2 84.84,12.57 84.07,13.34 84.07,13.84 82.55,15.37 81.03,15.37 80.69,15.04 J15.9 80.69,13.03 v81.79,11.94 | J11.3 85.35,20.06 v84.84,20.57 | J12.3 73.02,19.06 73.53,18.54 v73.53,16.38
  Bottom 0.203: 84.07,20.57 84.07,15.37 81.79,13.08 v81.79,11.94 80.14,10.29 77.22,10.29 73.53,13.97 v73.53,16.38 | 84.07,20.57 84.07,37.34 J14.3 | v84.84,20.57 84.07,20.57
SDA3  (via drill 0.3)
  Top 0.203: R20.2 27.94,47.37 27.18,48.13 27.18,48.64 25.65,50.16 24.13,50.16 23.8,49.83 J20.9 23.8,47.83 v24.89,46.74 | J16.3 28.46,54.86 v27.94,55.37 | J17.3 16.12,53.86 16.64,53.34 v16.64,51.18
  Bottom 0.203: 27.18,55.37 27.18,50.16 24.89,47.88 v24.89,46.74 23.24,45.08 20.32,45.08 16.64,48.77 v16.64,51.18 | 27.18,55.37 27.18,72.14 J19.3 | v27.94,55.37 27.18,55.37
SDA4  (via drill 0.3)
  Top 0.203: R26.2 56.39,47.37 55.63,48.13 55.63,48.64 54.1,50.16 52.58,50.16 52.25,49.83 J25.9 52.25,47.83 v53.34,46.74 | J21.3 56.9,54.86 v56.39,55.37 | J22.3 44.57,53.86 45.08,53.34 v45.08,51.18
  Bottom 0.203: 55.63,55.37 55.63,50.16 53.34,47.88 v53.34,46.74 51.69,45.08 48.77,45.08 45.08,48.77 v45.08,51.18 | 55.63,55.37 55.63,72.14 J24.3 | v56.39,55.37 55.63,55.37
SDA5  (via drill 0.3)
  Top 0.203: R32.2 84.84,47.37 84.07,48.13 84.07,48.64 82.55,50.16 81.03,50.16 80.69,49.83 J30.9 80.69,47.83 v81.79,46.74 | J26.3 85.35,54.86 v84.84,55.37 | J27.3 73.02,53.86 73.53,53.34 v73.53,51.18
  Bottom 0.203: 84.07,55.37 84.07,50.16 81.79,47.88 v81.79,46.74 80.14,45.08 77.22,45.08 73.53,48.77 v73.53,51.18 | 84.07,55.37 84.07,72.14 J29.3 | v84.84,55.37 84.07,55.37

## Text on the board
Dimension: Route Out | Route Out | Route Out | Route Out | Route Out | Route Out | Route Out | Route Out
Milling: v-score | v-score | v-score